# Altium PCB PCB1.PcbDoc
Units mm, origin at the board's own origin, x right, y up, seen from the top; angles counter-clockwise.
Board outline 80 x 20 mm, 2 copper layers (Top Layer, Bottom Layer); 70 components, 46 nets, 188 pads, 53 vias.
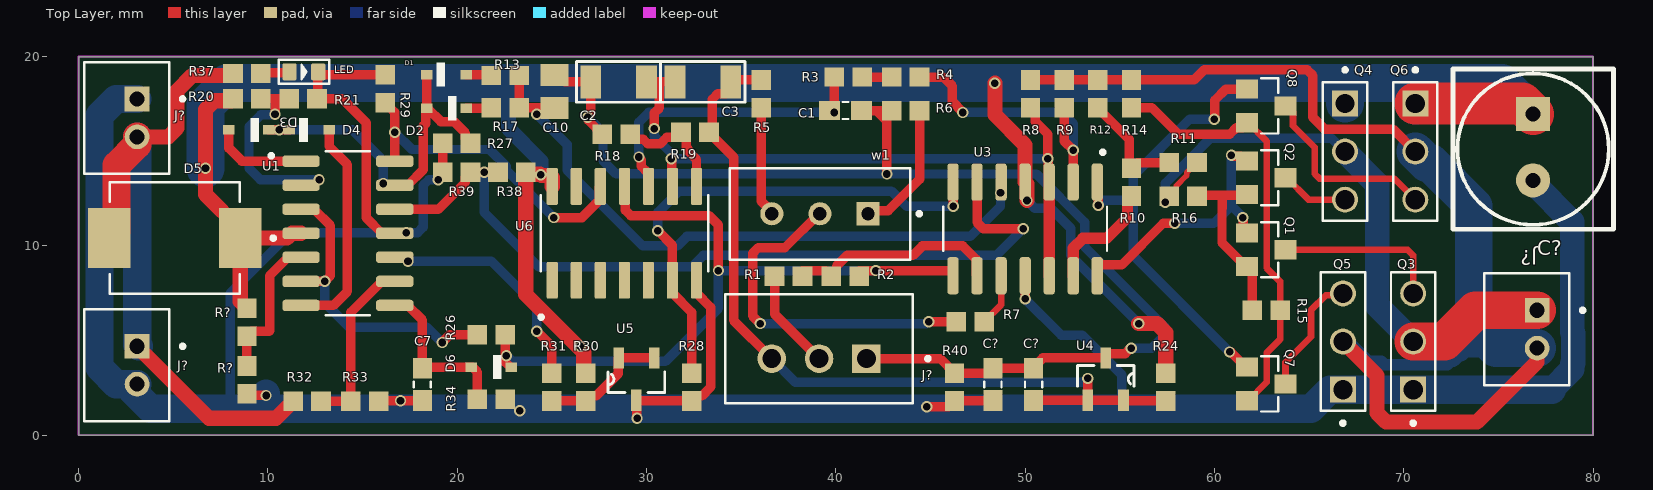
[diagram p0: Top Layer view]
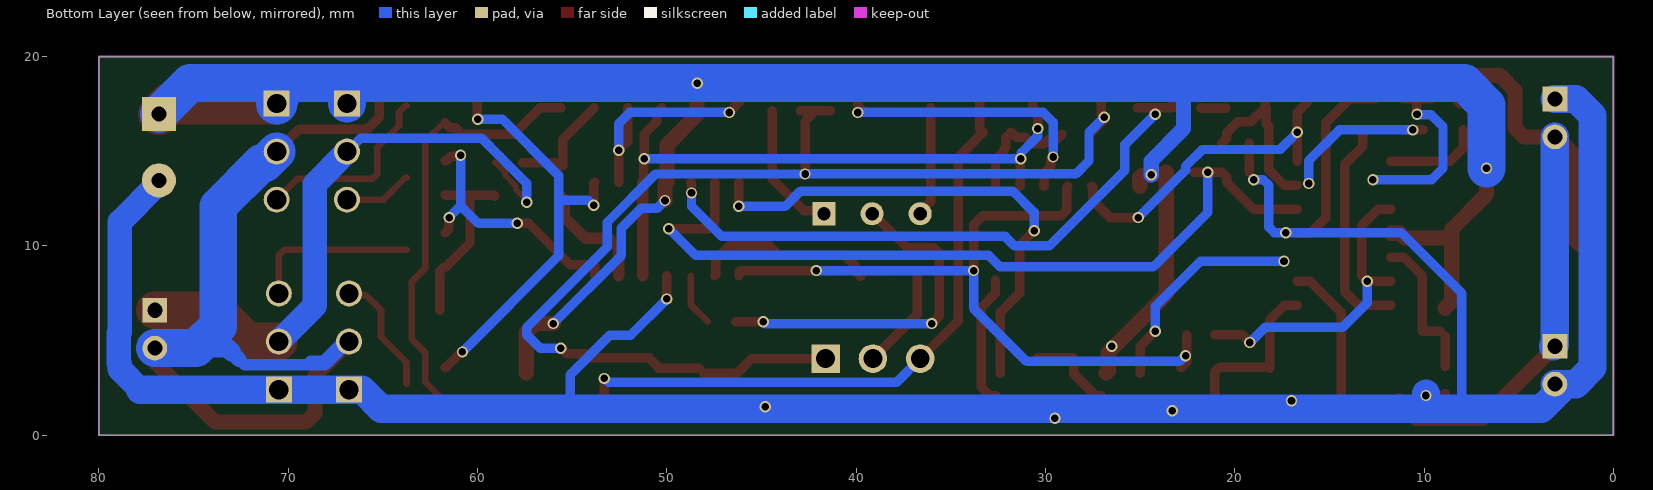
[diagram p1: Bottom Layer view, seen from below]
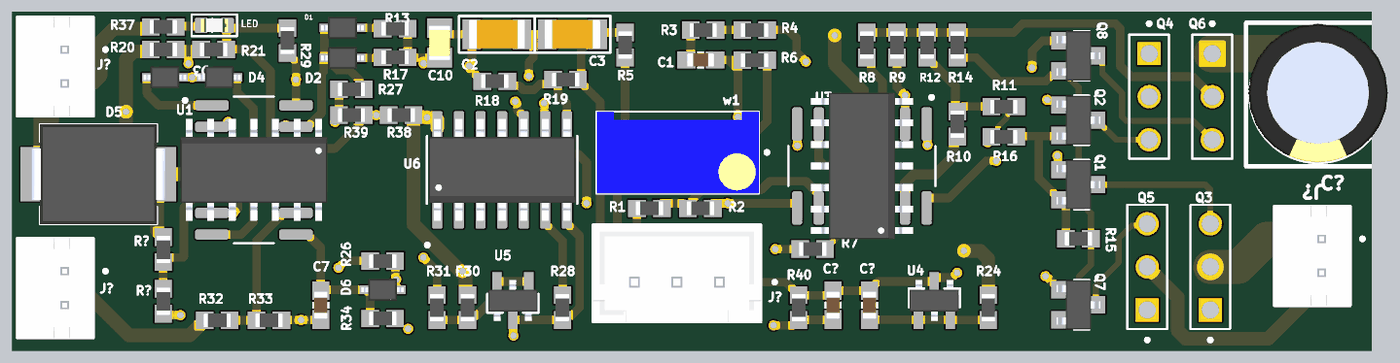
[diagram p2: 3D render of the assembled board from above, using the file's embedded part models]

## Layer stack, top to bottom
Top Solder: solder mask 0.0102, Solder Resist, Dk 3.5
Top Layer: signal copper 0.0356
Dielectric 1: dielectric 0.32, FR-4, Dk 4.8
Bottom Layer: signal copper 0.0356
Bottom Solder: solder mask 0.0102, Solder Resist, Dk 3.5

## Board outline
0,0 0,20 80,20 80,0

## Design rules (kind name [scope] priority, off if disabled: settings)
Clearance [All] p1: gap=0.25 ignorepadtopadclearanceinfootprint=FALSE
PolygonConnect [All] p1: connectstyle=Relief reliefconductorwidth=0.254 reliefentries=4 polygonreliefangle="90 Angle" airgapwidth=0.254
RoutingVias [All] p1: holewidth=0.711 width=1.27 viastyle="Through Hole" minholewidth=0.711 minwidth=1.27 maxholewidth=0.711 maxwidth=1.27
SolderMaskExpansion [All] p1: expansion=0.102 istentingtop=FALSE
Width [All] p1: maxlimit=2.3 minlimit=0.254 preferedwidth=0.5 minimp=50.000000 maximp=50.000000 favimp=50.000000
30 further rules are at their usual default settings.

## Classes and differential pairs
component class Sheet1: C1 C2 C3 C7 C10 C? D1 D2 D3 D4 D5 D6 LED Q1 Q2 Q7 Q8 R1 R2 R3 R4 R5 R6 R7 R8 R9 R10 R11 R12 R13 R14 R15 R16 R17 R18 R19 R20 R21 R24 R26 R27 R28 R29 R30 R31 R32 R33 R34 R37 R38 R39 R40 R? U1 U3 U4 U5 U6 VR? w1

## Components (designator, comment, footprint, x,y, rotation, side; value= is the part's Value field where it differs from the comment)
C1 "C0603" CAPC1608X90 40.513,17.155 r180 top
C2 "c" CAP1206 32.822,20.909 r180 top
C3 "c" CAP1206 37.267,20.909 r180 top
C7 "C0603" CAPC1608X90 18.161,2.691 r90 top
C10 "C0805" CAPC2012X88N 25.146,18.161 r270 top
C? "C0603" CAPC1608X90 48.3,2.691 r270 top
C? "C0603" CAPC1608X90 50.446,2.691 r270 top
C? "10uF" "Cap electrolitic radial 8x14-3.5" 71.984,21.134 r270 top
D1 "1N4148WS-13-F" SOD2513X120N 19.433,19.05 r0 top
D2 "1N4148WS-13-F" SOD2513X120N 19.433,17.272 r180 top
D3 "1N4148WS-13-F" SOD2513X120N 8.985,16.129 r180 top
D4 "1N4148WS-13-F" SOD2513X120N 12.192,16.129 r0 top
D5 "SS34" DIOM7959X265N 5.08,10.414 r180 top
D6 "1N4148WS-13-F" SOD2513X120N 21.8,3.6 r180 top
J? "B2B-PH-K-S(LF)(SN)" JST_B2B-PH-K-S(LF)(SN) 76.5,5.6 r90 top
J? "B2B-PH-K-S(LF)(SN)" JST_B2B-PH-K-S(LF)(SN) 2.54,16.764 r90 top
J? "B2B-PH-K-S(LF)(SN)" JST_B2B-PH-K-S(LF)(SN) 2.54,3.699 r90 top
J? "B3B-XH-A(LF)(SN)" JST_B3B-XH-A(LF)(SN) 39.116,4.572 r0 top
LED "LED-SMD-RED-DIFFUSED(0603)" LED-0603 11.9,19.193 r0 top
Q1 "Y2(SOT-23)" SOT-23 62.738,9.8 r270 top
Q2 "J3Y(SOT-23)" SOT-23 62.738,13.6 r270 top
Q3 "644884-3" TE_644884-3 70.5,2.41 r90 top
Q4 "644884-3" TE_644884-3 66.9,17.526 r270 top
Q5 "644884-3" TE_644884-3 66.788,2.41 r90 top
Q6 "644884-3" TE_644884-3 70.612,17.526 r270 top
Q7 "Y2(SOT-23)" SOT-23 62.738,2.713 r270 top
Q8 "J3Y(SOT-23)" SOT-23 62.738,17.399 r270 top
R1 "RC0603" RESC1607X60N 37.5,8.4 r180 top
R2 "RC0603" RESC1607X60N 40.5,8.4 r180 top
R3 "RC0603" RESC1607X60N 40.658,18.923 r180 top
R4 "RC0603" RESC1607X60N 43.688,18.923 r180 top
R5 "RC0603" RESC1607X60N 36.068,18.034 r90 top
R6 "RC0603" RESC1607X60N 43.688,17.145 r180 top
R7 "RC0603" RESC1607X60N 47.1,6 r180 top
R8 "RC0603" RESC1607X60N 50.281,18.034 r270 top
R9 "RC0603" RESC1607X60N 52.059,18.034 r270 top
R10 "RC0603" RESC1607X60N 55.615,13.372 r270 top
R11 "RC0603" RESC1607X60N 58.347,14.405 r0 top
R12 "RC0603" RESC1607X60N 53.837,18.034 r270 top
R13 "RC0603" RESC1607X60N 22.535,19 r0 top
R14 "RC0603" RESC1607X60N 55.615,18.034 r270 top
R15 "RC0603" RESC1607X60N 62.738,6.604 r180 top
R16 "RC0603" RESC1607X60N 58.347,12.627 r180 top
R17 "RC0603" RESC1607X60N 22.535,17.3 r0 top
R18 "RC0603" RESC1607X60N 28.4,15.9 r180 top
R19 "RC0603" RESC1607X60N 32.561,16 r0 top
R20 "RC0603" RESC1607X60N 8.89,17.78 r0 top
R21 "RC0603" RESC1607X60N 11.86,17.78 r0 top
R24 "RC0603" RESC1607X60N 57.431,2.546 r270 top
R26 "RC0603" RESC1607X60N 21.8,5.3 r0 top
R27 "RC0603" RESC1607X60N 19.965,15.424 r0 top
R28 "RC0603" RESC1607X60N 32.385,2.546 r90 top
R29 "RC0603" RESC1607X60N 16.2,18.3 r270 top
R30 "RC0603" RESC1607X60N 26.797,2.546 r90 top
R31 "RC0603" RESC1607X60N 25,2.546 r90 top
R32 "RC0603" RESC1607X60N 12.065,1.801 r0 top
R33 "RC0603" RESC1607X60N 15.113,1.801 r180 top
R34 "RC0603" RESC1607X60N 21.8,1.905 r0 top
R37 "RC0603" RESC1607X60N 8.89,19.106 r0 top
R38 "RC0603" RESC1607X60N 22.886,13.9 r0 top
R39 "RC0603" RESC1607X60N 19.965,13.9 r0 top
R40 "RC0603" RESC1607X60N 46.272,2.546 r90 top
R? "RC0603" RESC1607X60N 8.89,2.921 r90 top
R? "RC0603" RESC1607X60N 8.89,5.969 r90 top
U1 "LM324DG4" SOIC127P600X175-14N#1 14.224,10.668 r0 top
U3 "LM324DG4" SOIC127P600X175-14N#1 50,10.9 r270 top
U4 "TL431ASA-7" SOT95P240X135-3N 54.256,2.967 r270 top
U5 "TL431ASA-7" SOT95P240X135-3N 29.464,2.967 r90 top
U6 "MC14066BDG" SOIC127P600X175-14N#2 28.829,10.668 r90 top
w1 "3296W-1-104" TRIM_3296W-1-104 39.16,11.7 r180 top

## Footprints (in the part's own frame and the unit in brackets; to place one, negate y for a bottom-side part, rotate by r counter-clockwise, add the part's x,y. Pads: shape width x height; smd on the part's side, far side on the other; paste and mask are expansions set on the pad)
CAP1206 [mm]
  rect 1.1x1.75 smd: 1(2.821,2.24) 2(5.771,2.24)
  silkscreen extent 2.07,1.17 6.52,3.31, body extent 2.65,1.39 5.95,3.09, height 0.94
"Cap electrolitic radial 8x14-3.5" [mm]
  rect 1.8x1.8 hole 0.8: 1(4.172,4.851)
  round 1.8 hole 0.8: 2(7.672,4.851)
  silkscreen extent 1.78,0.62 10.25,9.09, body extent 1.82,0.75 10.02,8.95, height 14.6
CAPC1608X90 [mm]
  rect 1.1x1 smd: 1(-0.85,0) 2(0.85,0)
  silkscreen extent -0.15,-0.45 0.15,0.45, body extent -0.8,-0.4 0.8,0.4, height 0.95
CAPC2012X88N [mm]
  rect 1.16x1.47 smd: 1(-0.875,0) 2(0.875,0)
  body extent -1.02,-0.64 1.02,0.64, height 1.4
DIOM7959X265N [mm]
  rect 2.25x3.18 smd: A(3.455,0) C(-3.455,0)
  silkscreen extent -5.3,-2.95 3.44,2.95, body extent -3.98,-2.95 3.98,2.95, height 2.65
JST_B2B-PH-K-S(LF)(SN) [mm]
  rect 1.308x1.308 / inner round 1.308 / far side rect 1.308x1.308 hole 0.8: 1(1,-0.55)
  round 1.308 hole 0.8: 2(-1,-0.55)
  silkscreen extent -2.95,-3.05 2.95,2.25, body extent -2.95,-2.25 2.95,2.25, height 6
JST_B3B-XH-A(LF)(SN) [mm]
  rect 1.508x1.508 / inner round 1.508 / far side rect 1.508x1.508 hole 1: 1(2.5,-0.525)
  round 1.508 hole 1: 2(0,-0.525) 3(-2.5,-0.525)
  silkscreen extent -4.95,-2.88 5.85,2.88, body extent -4.95,-2.88 4.95,2.88, height 7
LED-0603 [mil]
  rrect25% 30x35 smd: NEG(30,0) POS(-30,0)
  silkscreen extent -52,-25 53,25, body extent -31,-16 31,16, height 20
RESC1607X60N [mm]
  rect 1.04x1.02 smd: 1(-0.735,0) 2(0.735,0)
  body extent -0.8,-0.4 0.8,0.4, height 0.55
SOD2513X120N [mm]
  rect 0.6x0.5 smd: A(1.05,0) C(-1.05,0)
  silkscreen extent -0.53,-0.63 -0.1,0.63, body extent -1.25,-0.65 1.25,0.65, height 1.2
SOIC127P600X175-14N#1 [mm]
  rrect50% 1.97x0.6 smd: 1(-2.475,3.81) 2(-2.475,2.54) 3(-2.475,1.27) 4(-2.475,0) 5(-2.475,-1.27) 6(-2.475,-2.54) 7(-2.475,-3.81) 8(2.475,-3.81) 9(2.475,-2.54) 10(2.475,-1.27) 11(2.475,0) 12(2.475,1.27) 13(2.475,2.54) 14(2.475,3.81)
  silkscreen extent -4.15,-4.33 1.17,4.33, body extent -3,-4.33 3,4.33, height 1.75
SOIC127P600X175-14N#2 [mm]
  rrect25% 1.95x0.59 smd: 1(-2.48,3.81) 2(-2.48,2.54) 3(-2.48,1.27) 4(-2.48,0) 5(-2.48,-1.27) 6(-2.48,-2.54) 7(-2.48,-3.81) 8(2.48,-3.81) 9(2.48,-2.54) 10(2.48,-1.27) 11(2.48,0) 12(2.48,1.27) 13(2.48,2.54) 14(2.48,3.81)
  silkscreen extent -4.53,-4.43 2,4.5, body extent -3,-4.33 3,4.33, height 1.75
SOT95P240X135-3N [mil]
  rect 44x22 smd: 1(-44,0) 2(44,-37) 3(44,37)
  silkscreen extent -28,-59 15,59, body extent -47,-57 47,57, height 45
SOT-23 [mil]
  rect 40x45 smd: 1(-35,-40) 2(35,-40) 3(0,40)
  silkscreen extent -58,-10 58,25, body extent -57,-51 57,51, height 55
TE_644884-3 [mm]
  rect 1.37x1.37 / inner round 1.37 / far side rect 1.37x1.37 hole 1.02: 1(0,0)
  round 1.37 hole 1.02: 2(2.54,0) 3(5.08,0)
  silkscreen extent -1.87,-1.17 6.2,1.17
TRIM_3296W-1-104 [mm]
  rect 1.218x1.218 / inner round 1.218 / far side rect 1.218x1.218 hole 0.71: 1(-2.54,0)
  round 1.218 hole 0.71: 2(0,0) 3(2.54,0)
  silkscreen extent -5.35,-2.41 4.76,2.42, body extent -4.76,-2.41 4.76,2.42, height 11.55

## Part data
C1 C7 C? C?: library part C0603C104K3RACTU, "Capacitor;Ceramic;Cap;.100uF;Tol 10%;SMT;Vol-Rtg 25V;X7R;Cut Tape", Package="603-2 KEMET", Check_prices=https://www.snapeda.com/parts/C0603C104K3RACTU/KEMET/view-part/?ref=eda, MF=KEMET, MP=C0603C104K3RACTU, SnapEDA_Link=https://www.snapeda.com/parts/C0603C104K3RACTU/KEMET/view-part/?ref=snap
C2 C3: library part CAP1206, "CAP1206"
C10: library part C0805C106K4PACTU, "10 ÂµF Â±10% 16V Ceramic Capacitor X5R 0805 (2012 Metric)", Package="0805 Kemet", Check_prices=https://www.snapeda.com/parts/C0805C106K4PACTU/KEMET/view-part/?ref=eda, MF=KEMET, MP=C0805C106K4PACTU, SnapEDA_Link=https://www.snapeda.com/parts/C0805C106K4PACTU/KEMET/view-part/?ref=snap
C?: library part "Cap electrolitic radial 8x14-3.5", "Cap electrolitic radial 8x14-3.5"
D1 D2 D3 D4 D6: "Diode Standard 75 V 150mA Surface Mount SOD-323", Package="SOD-323 Diodes Inc.", Check_prices=https://www.snapeda.com/parts/1N4148WS-13-F/Diodes+Inc./view-part/?ref=eda, MF="Diodes Inc.", MP=1N4148WS-13-F, SnapEDA_Link=https://www.snapeda.com/parts/1N4148WS-13-F/Diodes+Inc./view-part/?ref=snap
D5: "Diode Schottky 40 V 3A Surface Mount SMC (DO-214AB)", Package="SMC-2 ON Semiconductor", Check_prices=https://www.snapeda.com/parts/SS34/Onsemi/view-part/?ref=eda, MF=onsemi, MP=SS34, SnapEDA_Link=https://www.snapeda.com/parts/SS34/Onsemi/view-part/?ref=snap
J? J? J?: "Connector Header Through Hole 2 position 0.079 (2.00mm)", Package=None, Check_prices=https://www.snapeda.com/parts/B2B-PH-K-S%20(LF)(SN)/JST/view-part/?ref=eda, MF=JST, MP="B2B-PH-K-S (LF)(SN)", SnapEDA_Link=https://www.snapeda.com/parts/B2B-PH-K-S%20(LF)(SN)/JST/view-part/?ref=snap
J?: "Connector Header Through Hole 3 position 0.098 (2.50mm)", Package=None, Check_prices=https://www.snapeda.com/parts/B3B-XH-A(LF)(SN)/JST/view-part/?ref=eda, MF="JST Sales", MP=B3B-XH-A(LF)(SN), SnapEDA_Link=https://www.snapeda.com/parts/B3B-XH-A(LF)(SN)/JST/view-part/?ref=snap
LED: "Red - LED Indication - Discrete 1.95V 0603 (1608 Metric)", Package="0603 Everlight Electronics", Check_prices=https://www.snapeda.com/parts/19-217/R6C-AL1M2VY/3T/Everlight/view-part/?ref=eda, MF="Everlight Electronics", MP=19-217/R6C-AL1M2VY/3T, SnapEDA_Link=https://www.snapeda.com/parts/19-217/R6C-AL1M2VY/3T/Everlight/view-part/?ref=snap
Q1 Q2 Q7 Q8: library part SMD-TRANSISTORS-NPN-25V-500MW(SOT-23), "Bipolar (BJT) Transistor NPN 25 V 500 mA 150MHz 300 mW Surface Mount SOT-23", Package=None, Availability="In Stock", Check_prices=https://www.snapeda.com/parts/S8050/Umwelt+Sensor+Teknik/view-part/?ref=eda, MF=UMW, MP=S8050, Price=None, Purchase-URL=https://pricing.snapeda.com/search/part/S8050/?ref=eda, SnapEDA_Link=https://www.snapeda.com/parts/S8050/Umwelt+Sensor+Teknik/view-part/?ref=snap
Q3 Q4 Q5 Q6: "Conn Unshrouded Header HDR 3 POS 2.54mm Solder ST Thru-Hole Bag/Box", Package=None, Check_prices=https://www.snapeda.com/parts/644884-3/TE+Connectivity+AMP+Connectors/view-part/?ref=eda, EU_RoHS_Compliance=Compliant, MF="TE Connectivity", MP=644884-3, SnapEDA_Link=https://www.snapeda.com/parts/644884-3/TE+Connectivity+AMP+Connectors/view-part/?ref=snap
R1 R2 R3 R4 R5 R6 R7 R8 R9 R10 R11 R12 R13 R14 R15 R16 R17 R18 R19 R20 R21 R24 R26 R27 R28 R29 R30 R31 R32 R33 R34 R37 R38 R39 R40 R? R?: library part RC0603JR-070RL, "0 Ohms Jumper 0.1W, 1/10W Chip Resistor 0603 (1608 Metric) Moisture Resistant Thick Film", Package="0603 Yageo", Check_prices=https://www.snapeda.com/parts/RC0603JR-070RL/Yageo/view-part/?ref=eda, MF=Yageo, MP=RC0603JR-070RL, SnapEDA_Link=https://www.snapeda.com/parts/RC0603JR-070RL/Yageo/view-part/?ref=snap
U1 U3: "4-Channel industry standard operational amplifier 14-SOIC 0 to 70", Package="SOIC-14 Texas Instruments", Check_prices=https://www.snapeda.com/parts/LM324DG4/Texas+Instruments/view-part/?ref=eda, MF="Texas Instruments", MP=LM324DG4, SnapEDA_Link=https://www.snapeda.com/parts/LM324DG4/Texas+Instruments/view-part/?ref=snap
U4 U5: "Shunt Voltage Reference IC Adjustable 2.495V 36 VV Â±1% 100 mA SOT-23-3", Package="SOT-23-3 Diodes Inc.", Check_prices=https://www.snapeda.com/parts/TL431ASA-7/Diodes+Inc./view-part/?ref=eda, MF="Diodes Inc.", MP=TL431ASA-7, SnapEDA_Link=https://www.snapeda.com/parts/TL431ASA-7/Diodes+Inc./view-part/?ref=snap
U6: "MC14066BDG, Analogue Switch Quad SPST, 12 V, 15 V, 5 V, 9 V, 14-Pin SOIC", Package="SOIC-14 ON Semiconductor", Check_prices=https://www.snapeda.com/parts/MC14066BDG/Onsemi/view-part/?ref=eda, MF="ON Semiconductor", MP=MC14066BDG, SnapEDA_Link=https://www.snapeda.com/parts/MC14066BDG/Onsemi/view-part/?ref=snap
w1: "TRIMMER - 3/8in SQ MT CERMET", Package="NON STANDARD-3 Bourns", Check_prices=https://www.snapeda.com/parts/3296W-1-104/Bourns/view-part/?ref=eda, MF=Bourns, MP=3296W-1-104, SnapEDA_Link=https://www.snapeda.com/parts/3296W-1-104/Bourns/view-part/?ref=snap

## Via types
v1: diameter 0.6, hole 0.4, Top Layer to Bottom Layer, 53 vias

## Nets (pads, with @x,y where several pads share a name; then routed paths per layer and width w, separated by ;. In a path a pad name is that pad's centre, name@x,y a point inside that pad or via, vN(x,y) a via of type N, cw(c..) or ccw(c..) an arc to the next point about the centre after c; other vN are vias at no path point)
12V: D5.A J?.1@3.09,4.699 J?.2@3.09,15.764 R32.1 R37.1 | length 34.8
  Top Layer w0.8: J?.1@3.09,4.699 6.889,0.9 10.419,0.9 11.21,1.691 11.22,1.691 R32.1 ; J?.2@3.09,15.764 4.731,15.764 5.2,16.233 5.2,18.2 5.996,18.996 8.045,18.996 R37.1
  Top Layer w1.5: D5.A 2,10.789 2,14.254 3.09,15.344 J?.2@3.09,15.764
  Bottom Layer w1.5: J?.2@3.09,15.764 3.09,4.784 J?.1@3.175,4.699
B3B: C3.1 C?.2@50.446,1.841 J?.3 R5.2 R19.2 R24.2 U4.2 U4.3 | length 43.8
  Top Layer w0.5: R5.2 34.546,18.769 34.546,18.444 34.146,18.044 33.764,18.044 33.471,17.751 33.471,16.176 R19.2 33.306,16 33.566,15.74 33.566,15.73 34.6,14.696 34.6,6.063 J?.3 ; C?.2@50.446,1.841 50.45,1.845 53.312,1.845 U4.2 ; v1(53.3,3) 53.308,2.992 53.308,1.857 U4.2 ; R24.2 55.225,1.811 55.196,1.84 U4.3 U4.2
  Bottom Layer w0.5: J?.3 37.87,2.793 53.066,2.793 53.273,3 v1(53.3,3)
C2,3_U6: C2.1 C3.2 R8.2 U3.3 U3.12 U6.9 | length 36.4
  Top Layer w0.5: C2.1 30.676,18.669 ; v1(30.4,16.2) 30.419,16.219 30.419,17.037 30.676,17.294 30.676,18.669 ; v1(31.3,14.609) 31.3,14.582 31.324,14.558 31.324,13.193 U6.9 ; C3.2 30.676,18.669 ; R8.2 50.541,17.039 50.541,16.559 51.2,15.9 51.2,14.573 51.22,14.553 51.22,13.425 U3.3
  Top Layer w0.6: U3.12 U3.3
  Bottom Layer w0.5: v1(30.4,16.2) 30.419,16.181 30.419,15.781 31.281,14.919 ; v1(31.3,14.609) 31.305,14.604 51.196,14.604 v1(51.2,14.6)
C10_U3: C10.2 R13.2 R17.2 U3.5 | length 34.2
  Top Layer w0.5: R13.2 R17.2 23.277,17.293 24.208,17.293 ; v1(24.208,16.95) 24.208,17.293 ; C10.2 25.139,17.293 24.208,17.293 ; v1(48.7,12.8) 48.7,13.345 U3.5
  Bottom Layer w0.5: v1(24.208,16.95) 25.8,15.358 25.8,14 29.8,10 31.631,10 32.131,10.5 47.1,10.5 48.7,12.1 v1(48.7,12.8)
D3,4_lm32: D1.C D2.A D3.C D4.C R27.2 U1.13 | length 18.7
  Top Layer w0.5: D3.C 10.587,16.129 v1(10.589,16.127) ; v1@10.589,16.129 D4.C ; U1.13 17.384,13.208 18.21,14.034 18.21,16.341 18.333,16.464 18.333,17.272 D2.A ; D1.C D2.A ; R27.2 20.69,15.424 20.43,15.684 20.43,15.961 19.826,16.565 19.14,16.565 18.433,17.272 D2.A
  Bottom Layer w0.5: v1(10.589,16.127) 14.473,16.127 16.1,14.5 v1(16.1,13.3)
D3_lm32: D3.A U1.1 | length 5.1
  Top Layer w0.5: D3.A 7.935,15.165 8.622,14.478 U1.1
D4_lm32: D4.A U1.7 | length 11.7
  Top Layer w0.5: U1.7 13.458,6.858 14.2,7.6 14.2,14.3 13.242,15.258 D4.A
D5_lm32: C?.1@76.835,16.962 D5.C Q4.1 Q6.1 R20.1 R24.1 R30.2 R38.2 R?.2@8.89,6.704 U1.4 U3.4 U6.14 | length 137.9
  Top Layer w0.8: R20.1 8.045,17.67 7.169,17.67 6.7,17.201 v1(6.7,14.1) 6.7,12.714 8.535,10.879 D5.C ; R?.2@8.89,6.704 8.89,6.714 8.535,7.069 D5.C ; U1.4 11.264,10.668 11.01,10.414 D5.C ; U6.14 25.019,13.618 24.914,13.723 24.444,13.723 v1(24.41,13.757) 24.377,13.79 23.731,13.79 R38.2 23.621,7.44 26.687,4.374 26.687,3.391 R30.2 ; v1(48.4,18.6) 48.4,16.927 50,15.327 U3.4 50.1,13.275 v1(50.1,12.4) ; v1(56,5.9) 56.962,5.9 57.431,5.431 R24.1
  Top Layer w2.2: Q6.1 76.271,17.526 C?.1@76.835,16.962
  Bottom Layer w0.5: v1(50.1,12.4) 50.5,12 51.339,12 52.4,10.939 52.4,9.5 v1(56,5.9)
  Bottom Layer w0.8: 22.7,18.6 22.7,16.2 24.41,14.49 v1(24.41,13.757)
  Bottom Layer w2: v1(6.7,14.1) 6.7,17.428 7.872,18.6 22.7,18.6 v1(48.4,18.6) 66.9,18.6 ; Q4.1 66.9,18 Q4.1@67,18.1 ; 67,18.6 70.5,18.6 ; 70.612,18.6 75.197,18.6 C?.1@76.835,16.962
  Bottom Layer w2.2: Q6.1@70.5,17.9 70.612,17.788 Q6.1
  other v1: 26.5,4.7
D6_lm32: C7.2 D6.A R34.1 U1.8 | length 8.8
  Top Layer w0.5: U1.8 17.384,6.858 18.161,6.081 C7.2 18.22,3.6 D6.A 20.8,3.6 21.065,3.335 R34.1
GND: C7.1 C?.2@48.3,1.841 C?.2@76.835,13.462 J?.1@3.09,17.764 J?.2@3.09,2.699 LED.NEG Q3.1 Q5.1 R21.2 R27.1 R28.1 R29.1 R33.1 R34.2 R39.1 R40.1 R?.1@8.89,2.186 U1.11 U3.11 U5.1 U6.7 | length 171.7
  Top Layer w0.5: R?.1@8.89,2.186 8.957,2.119 9.881,2.119 v1(9.9,2.1) ; R33.1 15.868,1.821 v1(17.004,1.821) 18.141,1.821 C7.1 ; R29.1 12.793,19.035 12.662,19.166 LED.NEG 12.628,19.159 12.628,17.814 R21.2 13.92,17.78 15.2,16.5 15.2,11.482 16.014,10.668 U1.11 ; R39.1 R27.1 ; U5.1@29.482,1.831 29.482,0.918 v1(29.5,0.9) ; U5.1@29.5,1.83 32.366,1.83 32.616,2.081 32.922,2.081 33.395,2.553 33.395,6.752 32.639,7.508 U6.7 ; v1(44.8,1.5) 45.961,1.5 46.002,1.541 46.012,1.541 46.272,1.801 R40.1 46.287,1.826 48.285,1.826 C?.2@48.3,1.841 ; v1(50,7.2) U3.11
  Bottom Layer w0.5: 8,1.4 8,7.5 11.2,10.7 v1(17.3,10.7) 17.907,10.7 18.2,10.993 18.2,13.207 18.493,13.5 v1(19,13.5) ; v1(50,7.2) 51.91,5.29 53.01,5.29 55.1,3.2 55.1,1.4
  Bottom Layer w1.3: C?.2@76.835,13.462 76.835,13.327 78.9,11.262 78.9,5.437 78.95,5.387 78.95,3.813 78.9,3.763 78.9,3.5 77.81,2.41
  Bottom Layer w1.5: J?.2@2.796,2.404 3.8,1.4 8,1.4 9.9,1.4 17.004,1.4 23.3,1.4 29.5,1.4 44.8,1.4 55.1,1.4 65.1,1.4 66.11,2.41 Q5.1 Q3.1 77.81,2.41 ; J?.2@3.09,2.699 1.979,2.699 1.1,3.578 1.1,16.885 1.979,17.764 J?.1@3.09,17.764 ; v1(9.9,2.1) v1@9.9,2.2
  other v1: 23.3,1.3
lm32_5: R?.1@8.89,5.234 R?.2@8.89,3.656 U1.5 | length 7.5
  Top Layer w0.5: R?.2@8.89,3.656 R?.1@8.89,5.234 ; R?.1@9.15,5.504 10.077,5.504 10.1,5.527 10.1,8.434 11.064,9.398 U1.5
lm32_14-U6: R29.2 U1.14 U6.12 | length 17.2
  Top Layer w0.5: R29.2 16.2,17.555 16.699,17.056 U1.14 ; v1(25.1,11.5) 26.591,11.5 27.514,12.423 27.514,13.103 U6.12
  Bottom Layer w0.5: v1(16.7,16) 17.606,15.094 21.713,15.094 22.6,14.207 22.6,14 v1(25.1,11.5)
NetD1_A: D1.A R13.1 | length 1.3
  Top Layer w0.5: D1.A 21.75,19.05 R13.1
NetD2_C: D2.C R17.1 | length 1.3
  Top Layer w0.5: D2.C 21.772,17.272 R17.1
NetJ?_2: J?.2@39.116,4.047 R1.2 | length 5.3
  Top Layer w0.5: R1.2 36.765,6.398 J?.2@39.116,4.047
NetLED_POS: LED.POS R37.2 | length 1.5
  Top Layer w0.5: R37.2 9.668,19.149 11.095,19.149 LED.POS
NetQ1_3: Q1.3 Q3.3 | length 8.9
  Top Layer w0.35: Q1.3 70.2,9.8 70.5,9.5 Q3.3
NetQ2_3: Q2.3 Q4.3 | length 3.6
  Top Layer w0.35: Q2.3 63.817,13.6 64.972,12.446 Q4.3
NetQ5_3: Q5.3 Q7.3 | length 6.5
  Top Layer w0.35: Q7.3 63.754,3.854 65.1,5.2 65.1,6.612 65.877,7.389 66.687,7.389 Q5.3
NetQ6_3: Q6.3 Q8.3 | length 10.1
  Top Layer w0.35: Q8.3 63.817,17.399 64.15,17.066 64.15,16.349 65.3,15.2 65.3,13.805 65.549,13.556 69.502,13.556 Q6.3
NetR3_1: R3.1 R4.2 | length 1.6
  Top Layer w0.5: R3.1 R4.2
NetR7_1: R7.1 U3.10 | length 2.8
  Top Layer w0.35: R7.1 47.845,6 48.73,6.885 U3.10
NetR10_1: R10.1 R11.1 R12.2 | length 6
  Top Layer w0.5: R12.2 53.837,17.289 55.5,15.626 55.5,14.222 55.72,14.222 55.903,14.405 R11.1
NetR30_1: R30.1 R31.1 U5.2 U5.3 | length 6.8
  Top Layer w0.5: R31.1 R30.1 26.797,1.821 27.057,2.081 27.334,2.081 28.495,3.241 28.495,4.055 U5.3 U5.2
Pot_1: R6.1 w1.1 | length 7.1
  Top Layer w0.5: w1.1 41.866,11.866 42.766,11.866 44.423,13.523 R6.1
Pot_2: R7.2 w1.2 | length 18.7
  Top Layer w0.5: v1(36,5.9) 35.6,6.3 35.6,9.607 35.893,9.9 37.3,9.9 w1.2@39.13,11.73 ; v1(44.9,6) R7.2
  Bottom Layer w0.5: v1(36,5.9) 44.773,5.9 44.873,6 v1(44.9,6)
Pot_3: R5.1 w1.3 | length 5.8
  Top Layer w0.5: R5.1 36.068,12.352 36.635,11.785 w1.3@36.635,11.685
q3_q4: J?.1@77.05,6.6 Q3.2 Q4.2 R11.2 R16.2 | length 32.9
  Top Layer w0.3: R16.2 57.622,12.627 57.982,12.987 57.982,13.175 58.532,13.725 58.532,13.865 59.072,14.405 R11.2
  Top Layer w2: Q3.2 72.15,4.95 73.8,6.6 J?.1@77.05,6.6
  Bottom Layer w0.5: v1(57.4,12.3) 57.4,13.3 58.8,14.7 59.795,15.695 66.172,15.695 66.881,14.986 Q4.2
  Bottom Layer w1.3: Q4.2 66.9,14.967 68.6,13.267 68.6,6.85 Q3.2
q5_q6: J?.2@77.05,4.6 Q5.2 Q6.2 R8.1 R9.1 R12.1 R14.1 | length 64.4
  Top Layer w0.5: R8.1 R9.1 R12.1 R14.1 58.924,18.769 59.451,19.296 64.904,19.296 65.2,19 65.2,16.793 65.822,16.171 69.427,16.171 Q6.2
  Top Layer w0.8: Q5.2 68.588,3.15 68.588,1.169 69.057,0.7 73.878,0.7 77.05,3.872 J?.2@77.05,4.6
  Bottom Layer w0.6: 68.8,3.81 68.895,3.715 72.315,3.715 72.6,4
  Bottom Layer w0.8: Q5.2 66.942,4.95 68.082,3.81 68.8,3.81 ; 72.6,4 73,4.4
  Bottom Layer w1: 73,4.4 73.2,4.6 J?.2@77.05,4.6
  Bottom Layer w2: Q6.2 71.217,14.381 71.414,14.381 73.7,12.095 73.7,5.772 74.872,4.6 J?.2@77.05,4.6
R1_U3: R1.1 R2.2 U3.9 | length 10.9
  Top Layer w0.5: R1.1@38.235,8.7 R2.2@39.498,8.7 ; R2.2 39.775,8.4 40.035,8.66 40.035,8.937 40.215,9.117 40.598,9.5 44.075,9.5 44.575,10 46.707,10 47.41,9.297 47.41,8.475 U3.9
R2_U3: D6.C R2.1 R26.2 U3.8 U6.11 | length 38.8
  Top Layer w0.5: R26.2 22.535,3.865 22.8,3.6 D6.C ; U6.11 28.874,13.103 28.874,11.893 29.167,11.6 33.307,11.6 33.8,11.107 v1(33.8,8.7) ; R2.1@41.235,8.7 46.14,8.7 46.19,8.65 U3.8
  Bottom Layer w0.5: v1(22.6,4.2) 22.627,4.2 22.927,3.9 31,3.9 33.8,6.7 33.8,8.746 33.846,8.7 v1(42.1,8.7)
R3_U6: C1.2 R3.2 U6.10 | length 16.3
  Top Layer w0.5: v1(29.6,14.7) 29.6,14.673 29.719,14.554 29.719,14.208 30.054,13.873 30.054,13.193 U6.10 ; C1.2 39.673,17.155 C1.2@39.796,17.278 ; v1(39.923,17.05) 39.923,17.15 C1.2@39.796,17.278 ; R3.2 39.923,17.405 C1.2@39.796,17.278
  Bottom Layer w0.5: v1(29.6,14.7) 29.6,16.531 30.119,17.05 v1(39.923,17.05)
R4_R9: R4.1 R9.2 U3.2 | length 15.2
  Top Layer w0.5: R4.1 45.677,18.923 46.156,18.444 46.156,17.621 46.7,17.077 v1(46.7,17.05) ; R9.2 52.059,15.541 v1(52.54,15.06) U3.2
  Bottom Layer w0.5: v1(46.7,17.05) 51.95,17.05 52.54,16.46 v1(52.54,15.06)
R6,C1_U4: C1.1 C2.2 C10.1 C?.1@48.3,3.541 C?.1@50.446,3.541 J?.1@41.616,4.047 R6.2 R18.2 R40.2 U4.1 | length 64.2
  Top Layer w0.5: C10.1 25.301,19.036 25.668,18.669 C2.2 27.051,16.978 26.9,16.827 v1(26.9,16.8) 26.919,16.781 26.919,16.636 27.655,15.9 R18.2 ; C1.1 41.368,17.15 42.143,17.15 ; J?.1@41.616,4.047 45.516,4.047 46.272,3.291 R40.2 C?.1@48.05,3.281 ; v1(42.7,13.8) 42.7,16.588 42.143,17.145 R6.2 ; C?.1@48.3,3.541 50.446,3.541 50.446,3.591 50.94,4.085 U4.1 54.256,4.283 54.285,4.312 55.285,4.312 55.573,4.6 v1(55.6,4.6)
  Bottom Layer w0.5: v1(26.9,16.8) 27.7,16 27.7,14.5 28.391,13.809 42.691,13.809 v1(42.7,13.8) 50.6,13.8 53.15,11.25 53.15,9.95 57.393,5.707 57.393,5.293 56.7,4.6 v1(55.6,4.6)
R10_U3: R10.2 U3.13 | length 6.2
  Top Layer w0.6: U3.13 52.54,9.889 53.051,10.4 54.3,10.4 55.405,11.505 55.405,12.427 R10.2
R14_q8_q7: Q7.2 Q8.2 R14.2 R15.1 | length 23.2
  Top Layer w0.35: Q7.2 61.785,1.824 62.757,2.796 62.757,4.347 63.473,5.063 R15.1 63.473,8.125 62.757,8.841 62.757,15.538 61.785,16.51 Q8.2
  Top Layer w0.5: R14.2 56.701,17.299 58.1,15.9 60.808,15.9 61.16,16.252 61.464,16.252 Q8.2
R16_q2_q1: Q1.2 Q2.2 R15.2 R16.1 | length 9.5
  Top Layer w0.5: R16.1 59.124,12.669 60.402,12.669 ; Q2.2 61.68,12.669 60.402,12.669 ; R15.2 62.003,8.653 61.745,8.911 Q1.2 61.658,8.911 60.4,10.169 60.4,12 60.402,12.002 60.402,12.669
R18,19_U6: R18.1 R19.1 U6.8 | length 6
  Top Layer w0.5: R18.1 29.395,15.64 29.829,15.64 30.069,15.4 30.731,15.4 31.071,15.74 31.555,15.74 31.816,16 R19.1 ; R19.1@32.096,15.74 32.096,15.204 32.2,15.1 32.2,15 32.639,14.561 U6.8
R20_lm32: R20.2 R21.1 U1.2 | length 10.1
  Top Layer w0.5: R20.2 10.375,17.78 ; v1(10.375,16.95) 10.375,17.78 ; R21.1 10.375,17.78
  Bottom Layer w0.5: v1(10.375,16.95) 10.356,16.931 9.631,16.931 9,16.3 9,14.1 9.6,13.5 v1(12.7,13.5)
R24_lm32: R26.1 U1.3 U1.6 | length 16.5
  Top Layer w0.5: U1.6 v1(13.007,8.128) 13.3,8.421 13.3,11.072 12.434,11.938 U1.3 ; v1(19.2,4.9) 19.6,5.3 R26.1
  Bottom Layer w0.5: v1(13.007,8.128) 13.007,6.993 14.3,5.7 18.4,5.7 v1(19.2,4.9)
R28_U6: R28.2 U3.7 U6.6 | length 26.9
  Top Layer w0.5: v1(30.6,10.8) 31.369,10.031 31.369,7.508 32.385,6.492 R28.2 ; U3.7 46.2,13.365 v1(46.2,12.1)
  Bottom Layer w0.5: v1@30.6,10.827 30.6,11.769 31.731,12.9 42.939,12.9 43.739,12.1 v1(46.2,12.1)
R31_lm32: R31.2 U1.10 | length 11.6
  Top Layer w0.5: v1(24.2,5.5) 25,4.7 R31.2
  Bottom Layer w0.5: v1(17.4,9.2) 21.8,9.2 24.2,6.8 v1(24.2,5.5)
R32_lm32: R32.2 R33.2 U1.9 | length 9.3
  Top Layer w0.5: R32.2 R33.2 14.378,6.492 16.014,8.128 U1.9
R39,38_lm32: R38.1 R39.2 U1.12 U3.6 | length 43.8
  Top Layer w0.5: U1.12 19.005,11.938 20.43,13.363 20.43,13.64 20.69,13.9 R39.2 v1(21.425,13.9) R38.1 ; U3.6 47.46,11.24 47.781,10.919 49.881,10.919 v1(49.9,10.9)
  Bottom Layer w0.5: v1(21.425,13.9) 21.425,11.775 24.3,8.9 32.4,8.9 33,9.5 48.473,9.5 49.873,10.9 v1(49.9,10.9)
U3_q1_q2: Q1.1 Q2.1 U3.14 | length 14.3
  Top Layer w0.5: U3.14 53.81,8.96 53.86,9.01 55.11,9.01 57.3,11.2 v1(57.9,11.2) ; v1(60.9,14.8) 60.927,14.8 60.98,14.747 61.4,14.747 61.658,14.489 Q2.1 ; v1(61.5,11.5) 61.519,11.481 61.519,10.892 Q1.1
  Bottom Layer w0.5: v1(57.9,11.2) 59.973,11.2 60.9,12.127 ; v1(60.9,14.8) 60.9,12.127 ; v1(61.5,11.5) 61.5,11.527 60.9,12.127
U3_q8_q7: Q7.1 Q8.1 U3.1 | length 24.3
  Top Layer w0.5: U3.1 53.86,13.325 v1(53.86,12.14) v1@53.9,12.1 ; v1(60,16.7) 60.019,16.719 60.019,17.695 60.612,18.288 Q8.1 ; v1(60.8,4.4) 60.819,4.381 60.88,4.381 61.658,3.602 Q7.1
  Bottom Layer w0.5: v1(53.86,12.14) 53.887,12.14 54.154,12.407 55.582,12.407 55.721,12.546 55.721,13.721 58.7,16.7 v1(60,16.7) ; 55.721,12.407 55.721,9.479 v1(60.8,4.4)
pads on no net: U6.1 U6.2 U6.3 U6.4 U6.5 U6.13

## Keep-outs
Keep-Out Layer:
  the board outline again, w0.1